# Altium PCB board2_pcb.PcbDoc
Units mil, origin at the board's own origin, x right, y up, seen from the top; angles counter-clockwise.
Board outline 3500 x 3500 mil, 2 copper layers (Top Layer, Bottom Layer), stack 61.756 mil thick; 47 components, 33 nets, 149 pads, 14 vias.
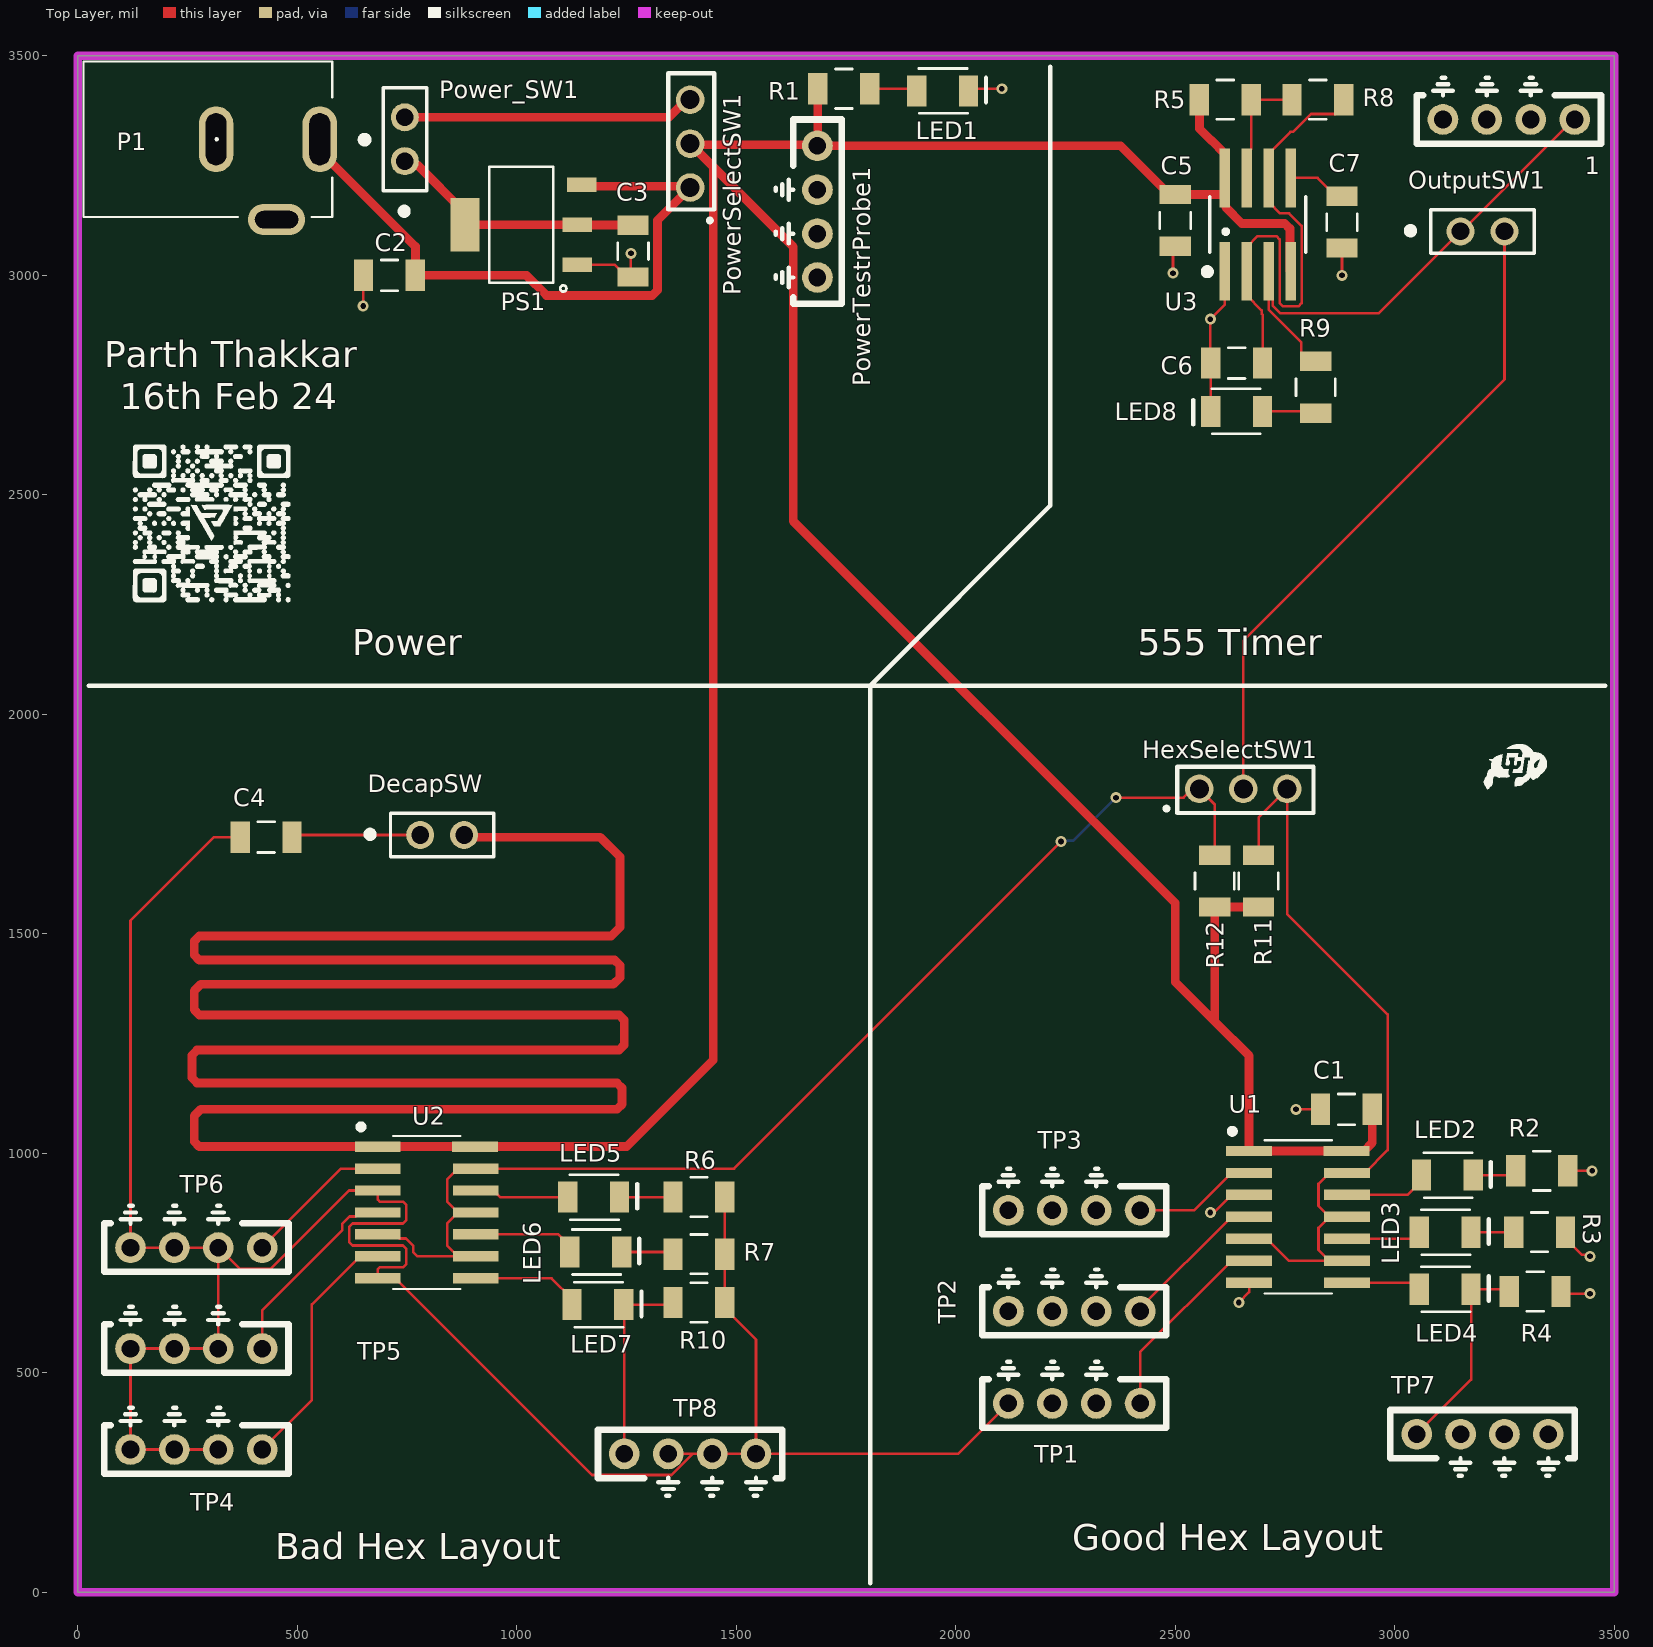
[diagram p0: Top Layer view]
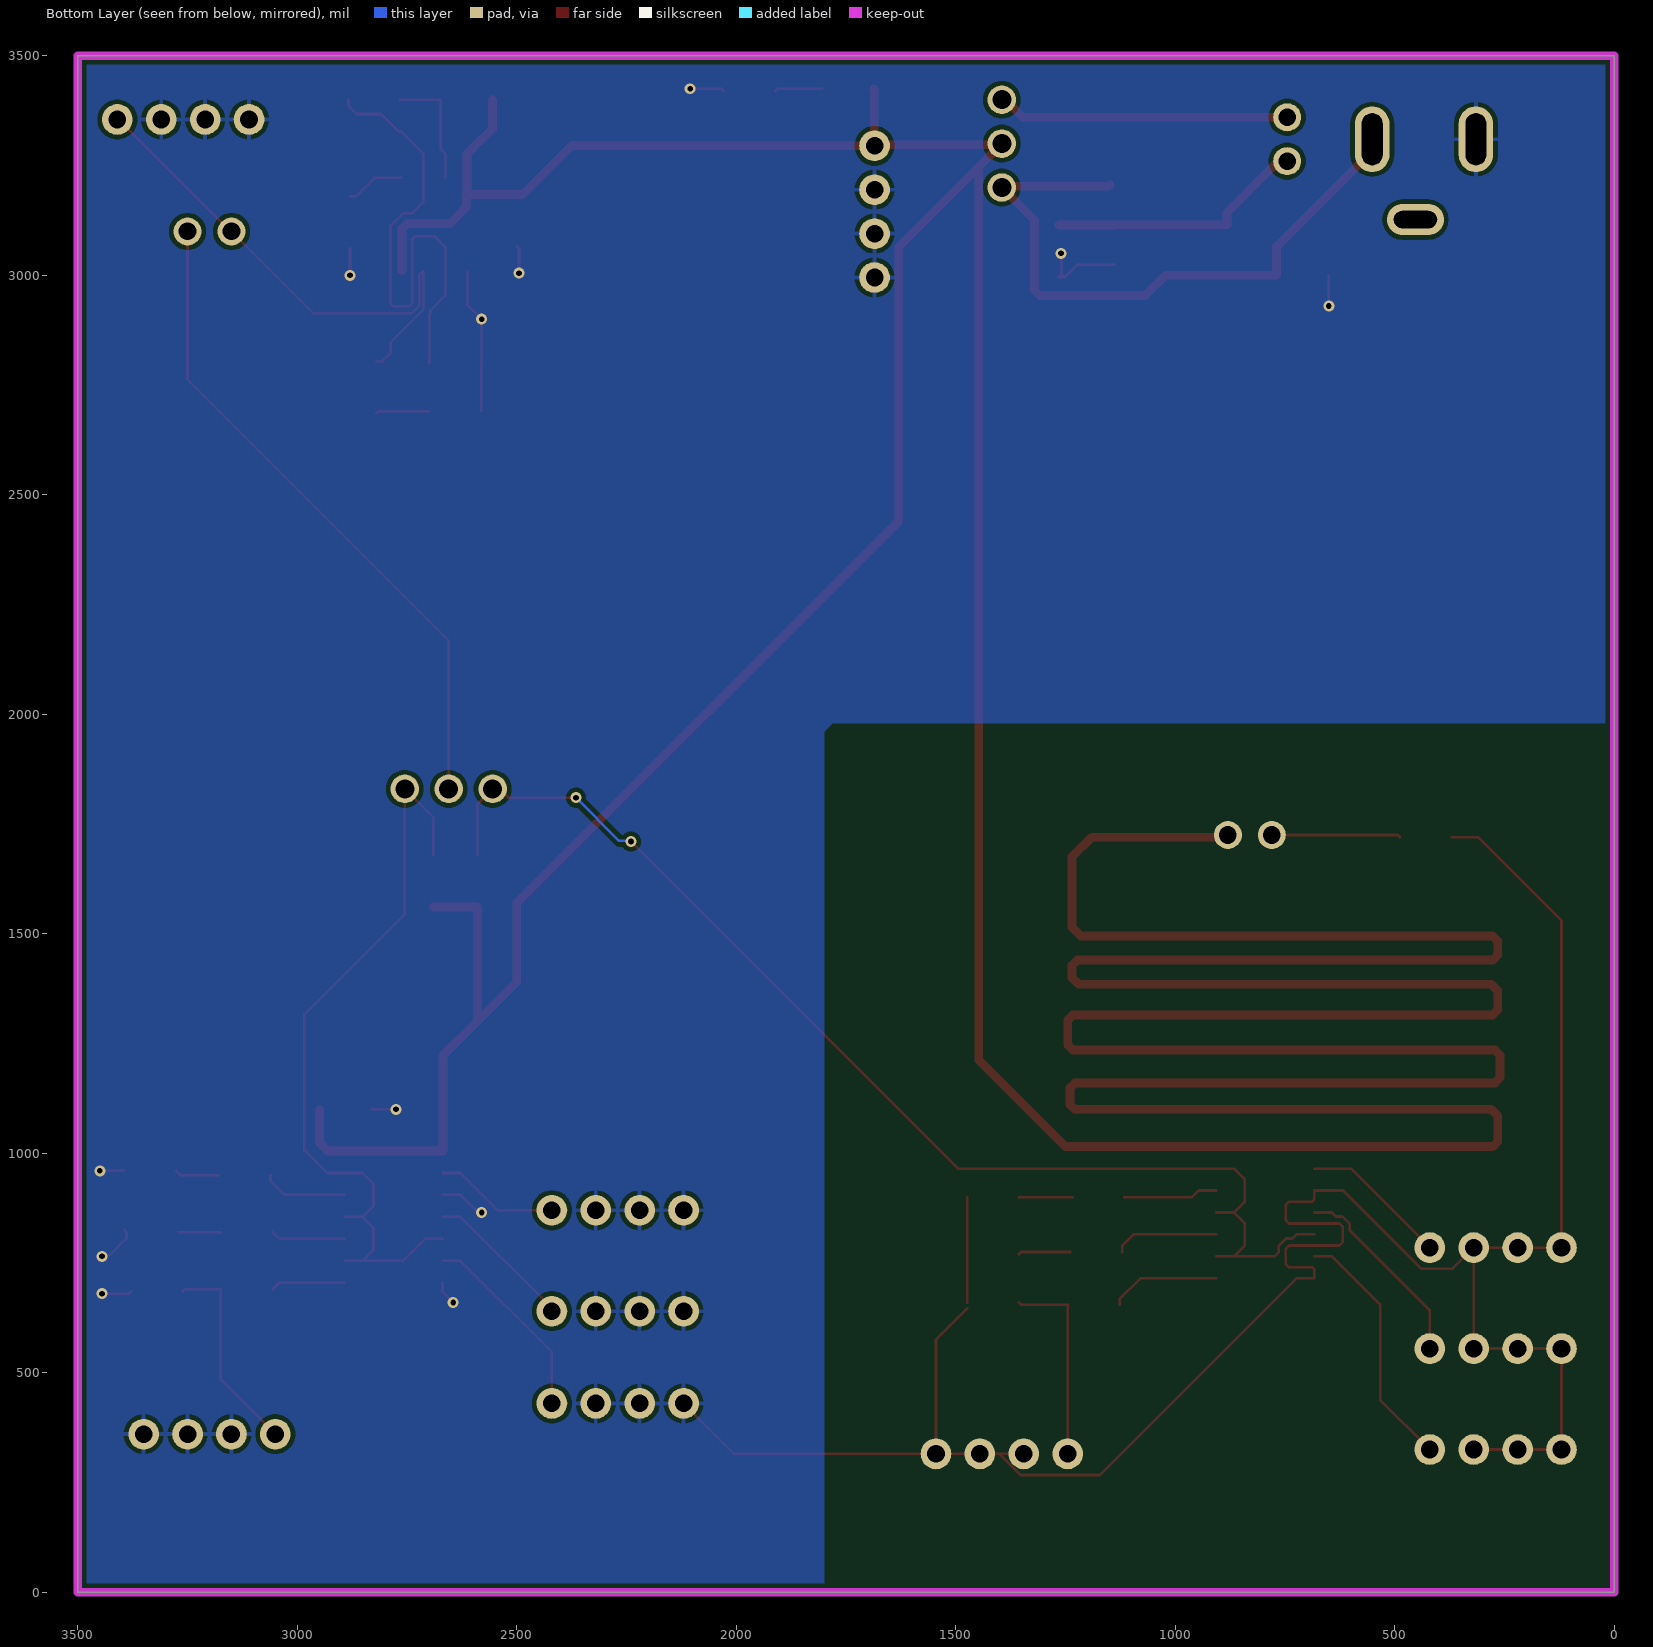
[diagram p1: Bottom Layer view, seen from below]
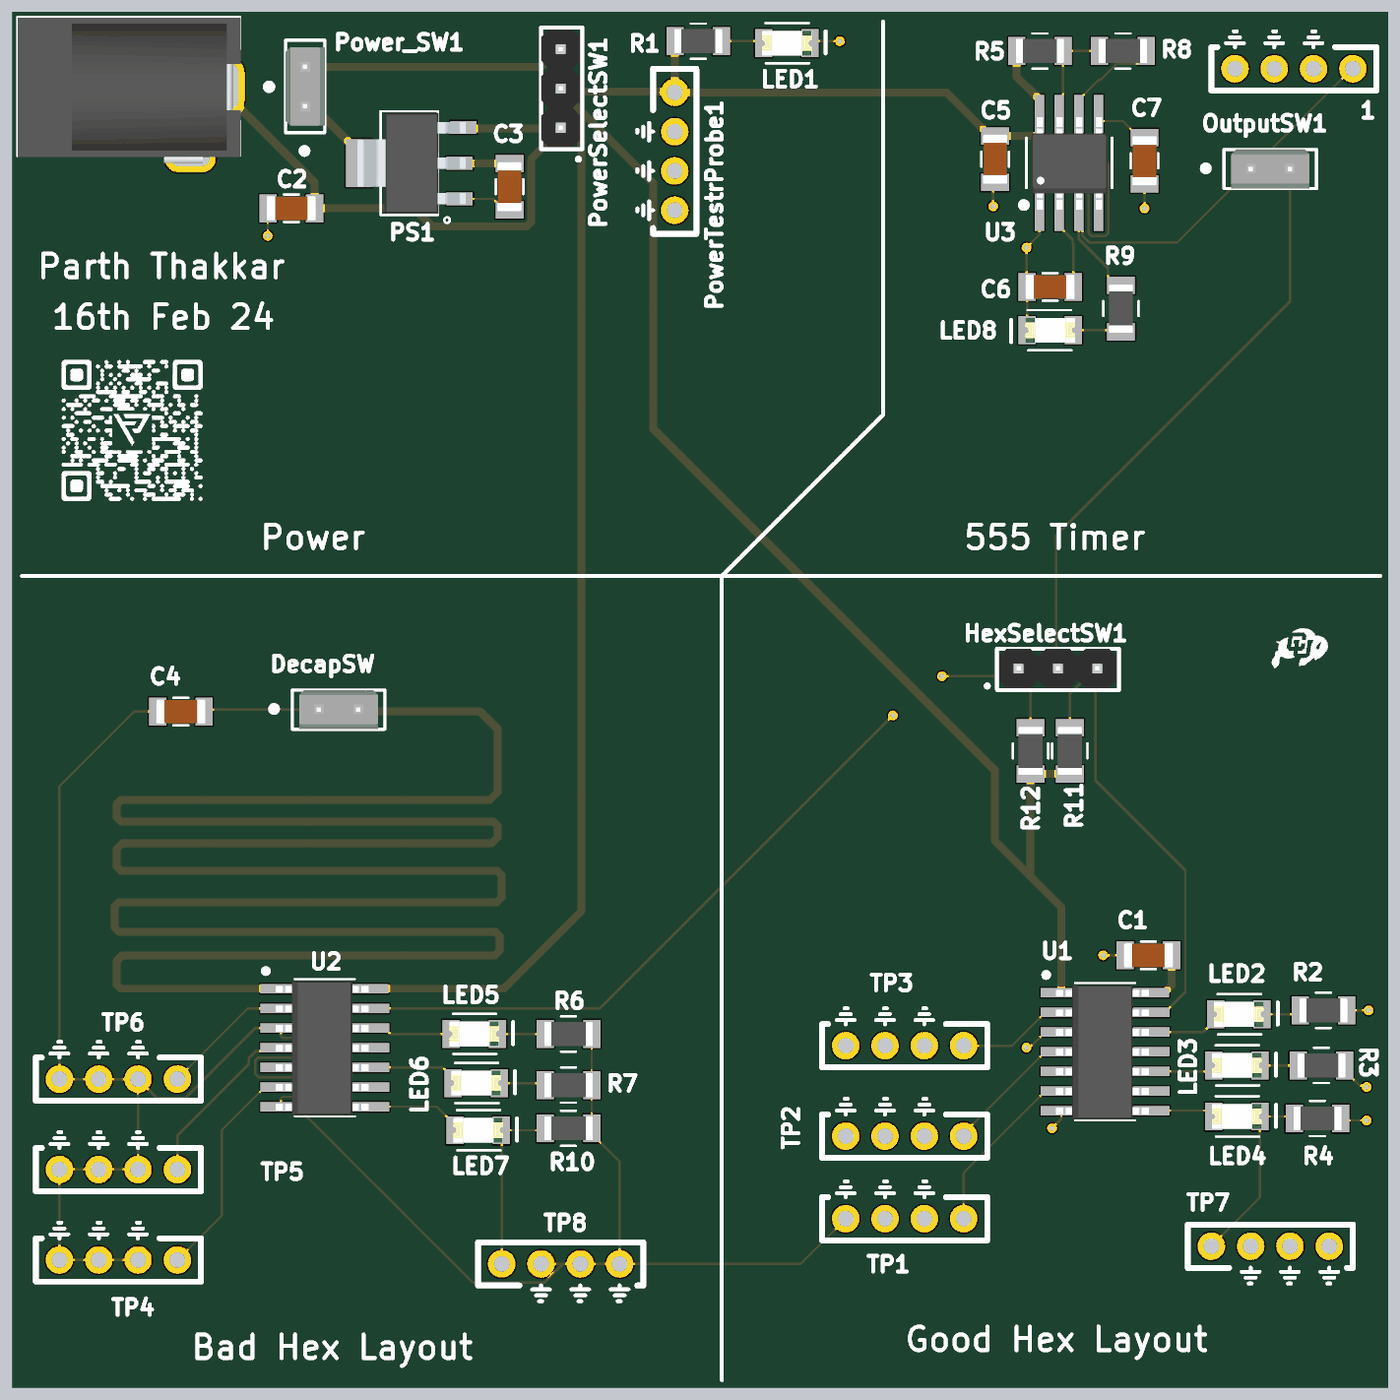
[diagram p2: 3D render of the assembled board from above, using the file's embedded part models]

## Layer stack, top to bottom
Top Solder: solder mask 1, SM-001, Dk 4
Top Layer: signal copper 1.378
Dielectric 1: core 59, Core-043, Dk 4.3
Bottom Layer: signal copper 1.378
Bottom Solder: solder mask 1, SM-001, Dk 4

## Board outline
0,0 3500,0 3500,3500 0,3500

## Design rules (kind name [scope] priority, off if disabled: settings)
BoardOutlineClearance [All] p1: gap=10 ignorepadtopadclearanceinfootprint=FALSE except(0: Arc-SplitContinuation Track-SplitContinuation SMDPad-SplitContinuation THPad-SplitContinuation Via-SplitContinuation Fill-SplitContinuation Poly-SplitContinuation Region-SplitContinuation Text-SplitContinuation)
Clearance [All] p1: gap=10 ignorepadtopadclearanceinfootprint=FALSE
HoleSize [All] p1: absolutevalues=TRUE maxlimit=150 minlimit=1 maxpercent=80.000 minpercent=20.000
PlaneClearance [All] p1: clearance=10
PolygonConnect [All] p1: thpad.connectstyle=Relief thpad.reliefconductorwidth=10 thpad.reliefentries=4 thpad.polygonreliefangle="90 Angle" thpad.airgapwidth=10 smdpad.connectstyle=Direct smdpad.reliefconductorwidth=10 smdpad.reliefentries=4 smdpad.polygonreliefangle="90 Angle" smdpad.airgapwidth=10 via.connectstyle=Direct via.reliefconductorwidth=10 via.reliefentries=4 via.polygonreliefangle="90 Angle" via.airgapwidth=10
RoutingVias [All] p1: holewidth=13 width=25 viastyle="Through Hole" minholewidth=13 minwidth=25 maxholewidth=50 maxwidth=60
SolderMaskExpansion [All] p1: expansion=4 istentingtop=FALSE
UnRoutedNet [All] p1: checkbadconnections=TRUE
Width "Schematic Width Constraint_3" [InNet('NetPower_SW1_2')] p1: maxlimit=30 minlimit=10 preferedwidth=20 minimp=50.000000 maximp=50.000000 favimp=50.000000
Width "Schematic Width Constraint_2" [InNet('VCC')] p2: maxlimit=30 minlimit=10 preferedwidth=20 minimp=50.000000 maximp=50.000000 favimp=50.000000
Width "Schematic Width Constraint_1" [InNet('NetC2_2')] p3: maxlimit=30 minlimit=10 preferedwidth=20 minimp=50.000000 maximp=50.000000 favimp=50.000000
Width "Schematic Width Constraint" [InNet('NetC3_2')] p4: maxlimit=30 minlimit=10 preferedwidth=20 minimp=50.000000 maximp=50.000000 favimp=50.000000
Width [All] p5: maxlimit=100 minlimit=6 preferedwidth=6 minimp=50.000000 maximp=50.000000 favimp=50.000000
27 further rules are at their usual default settings.

## Components (designator, comment, footprint, x,y, rotation, side; value= is the part's Value field where it differs from the comment)
1 "10x Probe TP" TP10x_Probe 3260,3355 r180 top
C1 "22pF" 1206_Passive_Capacitor 2890,1100 r0 top
C2 "10uF" 1206_Passive_Capacitor 710,3000 r0 top
C3 "10uF" 1206_Passive_Capacitor 1265,3055 r90 top
C4 "22pF" 1206_Passive_Capacitor 429,1720 r0 top
C5 "22pF" 1206_Passive_Capacitor 2500,3125 r270 top
C6 "1uF" 1206_Passive_Capacitor 2640,2800 r0 top
C7 "1uF" 1206_Passive_Capacitor 2880,3121 r90 top
DecapSW "SW_2Pin_100mil_Switch" 2Pin-Header-Conn 780,1725 r0 top
HexSelectSW1 "PREC003SAAN-RC" 3_PIN_100mil 2555,1830 r0 top value="CONN HEADER VERT 3POS 2.54MM"
LED1 "Blue" LED_1206 1970,3420 r0 top
LED2 "Blue" LED_1206 3120,950 r0 top
LED3 "Blue" LED_1206 3115,820 r0 top
LED4 "Blue" LED_1206 3115,690 r0 top
LED5 "Blue" LED_1206 1175,900 r0 top
LED6 "Blue" LED_1206 1180,775 r0 top
LED7 "Blue" LED_1206 1185,655 r0 top
LED8 "Blue" LED_1206 2640,2690 r180 top
OutputSW1 "SW_2Pin_100mil_Switch" 2Pin-Header-Conn 3150,3100 r0 top
P1 "Power Jack" Power_Jack 551.22,3310 r180 top value="CONN PWR JACK 2X5.5MM SOLDER"
Power_SW1 "SW_2Pin_100mil_Switch" 2Pin-Header-Conn 745,3260 r90 top
PowerSelectSW1 "PREC003SAAN-RC" 3_PIN_100mil 1395,3200 r90 top value="CONN HEADER VERT 3POS 2.54MM"
PowerTestrProbe1 "10x Probe TP" TP10x_Probe 1685,3145 r270 top
PS1 "AMS1117-3.3" LDO 1010,3115 r90 top value="IC REG LINEAR 3.3V 800MA SOT223"
R1 "1k" 1206_Passive_Resitor 1745,3425 r180 top value="1K Ohm"
R2 "50R" 1206_Passive_Resitor 3335,960 r180 top value="50 Ohm"
R3 "50R" 1206_Passive_Resitor 3330,820 r180 top value="50 Ohm"
R4 "50R" 1206_Passive_Resitor 3320,685 r180 top value="50 Ohm"
R5 "1k" 1206_Passive_Resitor 2614,3400 r180 top value="1K Ohm"
R6 "50R" 1206_Passive_Resitor 1415,900 r180 top value="50 Ohm"
R7 "50R" 1206_Passive_Resitor 1415,770 r180 top value="50 Ohm"
R8 "1k" 1206_Passive_Resitor 2825,3400 r180 top value="1K Ohm"
R9 "1k" 1206_Passive_Resitor 2820,2745 r90 top value="1K Ohm"
R10 "50R" 1206_Passive_Resitor 1415,660 r180 top value="50 Ohm"
R11 "10k" 1206_Passive_Resitor 2690,1620 r270 top value=10KOhm
R12 "10k" 1206_Passive_Resitor 2590,1620 r90 top value=10KOhm
TP1 "10x Probe TP" TP10x_Probe 2270,430 r180 top
TP2 "10x Probe TP" TP10x_Probe 2270,640 r180 top
TP3 "10x Probe TP" TP10x_Probe 2270,870 r180 top
TP4 "10x Probe TP" TP10x_Probe 270,325 r180 top
TP5 "10x Probe TP" TP10x_Probe 270,555 r180 top
TP6 "10x Probe TP" TP10x_Probe 270,785 r180 top
TP7 "10x Probe TP" TP10x_Probe 3200,360 r0 top
TP8 "10x Probe TP" TP10x_Probe 1395,315 r0 top
U1 "SN74AHC14DR" HEX_74AC14 2780,855 r0 top
U2 "SN74AHC14DR" HEX_74AC14 795,865 r0 top
U3 "LMC555CMX/NOPB" TS555IDTTR 2688.11,3115.6 r90 top

## Footprints (in the part's own frame and the unit in brackets; to place one, negate y for a bottom-side part, rotate by r counter-clockwise, add the part's x,y. Pads: shape width x height; smd on the part's side, far side on the other; paste and mask are expansions set on the pad)
2Pin-Header-Conn [mm]
  round 1.62 hole 1.02: 1(0,0) 2(2.54,0)
  silkscreen extent -3.02,-1.27 4.26,1.26, body extent -1.27,-1.27 3.81,1.27, height 8.13
3_PIN_100mil [mm]
  round 1.65 hole 1.1: 1(0,0) 2(2.54,0) 3(5.08,0)
  silkscreen extent -2,-1.4 6.6,1.27, body extent -1.14,-1.27 6.48,1.27, height 8.38
1206_Passive_Capacitor [mil]
  rect 44x71 smd: 1(-59,0) 2(59,0)
  silkscreen extent -19,-35 19,35, body extent -63,-31 63,32, height 50
1206_Passive_Resitor [mil]
  rect 44x71 smd: 1(-59,0) 2(59,0)
  silkscreen extent -19,-45 19,45, body extent -61,-31 61,31, height 26
HEX_74AC14 [mm]
  rect 2.65x0.6 smd: 1(-2.836,3.81) 2(-2.836,2.54) 3(-2.836,1.27) 4(-2.836,0) 5(-2.836,-1.27) 6(-2.836,-2.54) 7(-2.836,-3.81) 8(2.836,-3.81) 9(2.836,-2.54) 10(2.836,-1.27) 11(2.836,0) 12(2.836,1.27) 13(2.836,2.54) 14(2.794,3.81)
  silkscreen extent -3.94,-4.43 1.95,5.08, body extent -3.18,-4.35 2.82,4.3, height 1.75
LDO [mm]
  rect 0.838x1.7 smd: 1(-2.311,-3.25) 2(0,-3.25) 3(2.311,-3.5)
  rect 3.099x1.7 smd: 4(0,3.25)
  silkscreen extent -3.86,-2.62 3.35,1.85, body extent -3.25,-3.65 3.25,3.35, height 1.85
LED_1206 [mil]
  rect 44x71 smd: 1(-59,0) 2(59,0)
  silkscreen extent -54,-51 99,51, body extent -63,-31 63,31, height 28
Power_Jack [mm]
  oval 2x3.8 hole 1.2 slot 3 at 90 deg: 1(0,0) 2(6,0)
  oval 3.3x1.8 hole 1 slot 2.5 at 0 deg: 3(2.5,4.65)
  silkscreen extent -2.79,-4.5 13.68,4.5, body extent -0.76,-4.45 13.64,4.95, height 11.49
TP10x_Probe [mil] "Small Probs footprint"
  round 70 hole 40: 1(-150,0) 2(-50,0) 2(50,0) 2(150,0)
  silkscreen extent -210,-95 210,55
TS555IDTTR [mm] "IC OSC Single Timer 2.7MHz 8SOIC"
  rect 3.4x0.6 smd: 1(-2.7,1.905) 2(-2.7,0.635) 3(-2.7,-0.635) 4(-2.7,-1.905) 5(2.7,-1.905) 6(2.7,-0.635) 7(2.7,0.635) 8(2.7,1.905)
  silkscreen extent -2.85,-2.77 1.6,3.05, body extent -3.03,-2.48 2.96,2.43, height 1.75

## Part data
1 PowerTestrProbe1 TP1 TP2 TP3 TP4 TP5 TP6 TP7 TP8: library part TP_10x_Probe, "Test Point 300 mil centers"
C1 C4 C5: library part C_22pF_1206, "22pF ±5% 1kV C0G 1206 Multilayer Ceramic Capacitors MLCC - SMD/SMT RoHS", LCSC Part#=C107174, MFR Part #=CC1206JKNPOCBN220, Datasheet=https://datasheet.lcsc.com/lcsc/1810241219_YAGEO-CC1206JKNPOCBN220_C107174.pdf, Type=Extended
C2 C3: library part C_10uF_1206, "10uF ±10% 50V X5R 1206 Multilayer Ceramic Capacitors MLCC - SMD/SMT RoHS", LCSC Part#=C13585, MFR Part #=CL31A106KBHNNNE, Datasheet=https://datasheet.lcsc.com/lcsc/1810221112_Samsung-Electro-Mechanics-CL31A106KBHNNNE_C13585.pdf, Type=Basic
C6 C7: library part C_1uF_1206, "MULTILAYER CERAMIC CAPACITORS MLCC - SMD/SMT 1UF 50V 1206 ROHS", LCSC Part#=C1848, MFR Part #=CL31B105KBHNNNE, Digikey Link=https://www.digikey.com/product-detail/en/C1206C105M4RACTU/399-8150-1-ND/3471873/?itemSeq=304982366, Type=Basic
DecapSW OutputSW1 Power_SW1: "2Pin Header", LCSC Part#=C124375, Type=Extended
HexSelectSW1 PowerSelectSW1: library part SW_3Pin_100mil_Switch, "Connector Header Through Hole 3 position 0.100\" (2.54mm)", LCSC Part#=C49257, Digikey Link=https://www.digikey.com/product-detail/en/PREC003SAAN-RC/S1012EC-03-ND/2774851/?itemSeq=304982371, MFR Part #=PREC003SAAN-RC, Type=Extended
LED1 LED2 LED3 LED4 LED5 LED6 LED7 LED8: library part LED_BLUE_1206, "blue 1206  Light Emitting Diodes (LED) ROHS", LCSC Part#=C130717, MFR Part #=NCD1206B1, Datasheet=https://datasheet.lcsc.com/lcsc/2008201033_Foshan-NationStar-Optoelectronics-NCD1206B1_C130717.pdf, Type=Extended
P1: library part "P_Power Jack", "Power Barrel Connector Jack 2.10mm ID (0.083\"), 5.50mm OD (0.217\") Through Hole, Right Angle", LCSC Part#=C136744, MFR Part #=PJ-102A, Digikey Link=https://www.digikey.com/product-detail/en/PJ-102A/CP-102A-ND/275425/?itemSeq=304982367, Type=Extended
PS1: library part PS_AMS_LDO_3v3, "LOW DROPOUT REGULATORS(LDO) POSITIVE FIXED 1.3V @ 800MA 15V 3.3V 1A SOT-223 ROHS", LCSC Part#=C6186, MFR Part #=AMS1117-3.3, Type=Basic
R1 R5 R8 R9: library part R_1K_1206, "CHIP RESISTOR - SURFACE MOUNT 1KOHMS ±1% 1/4W 1206 ROHS", LCSC Part#=C4410, MFR Part #=RNCP1206FTD1K00CT, Digikey Link=https://www.digikey.com/product-detail/en/RNCP1206FTD1K00/RNCP1206FTD1K00CT-ND/2240675/?itemSeq=304982373, Type=Basic
R2 R3 R4 R6 R7 R10: library part R_1K_1206, "CHIP RESISTOR - SURFACE MOUNT 50OHMS ±1% 1/4W 1206 ROHS", LCSC Part#=C4410, MFR Part #=RNCP1206FTD1K00CT, Digikey Link=https://www.digikey.com/product-detail/en/RNCP1206FTD1K00/RNCP1206FTD1K00CT-ND/2240675/?itemSeq=304982373, Type=Basic
R11 R12: library part R_10KOhm_1206, "10 kOhms ±5% 0.25W, 1/4W Chip Resistor 1206 (3216 Metric) Automotive AEC-Q200 Thick Film", LCSC Part#=C17902, MFR Part #=RMCF1206FT10K0, Digikey Link=https://www.digikey.com/en/products/detail/stackpole-electronics-inc/RMCF1206FT10K0/1759669, Type=Basic
U1 U2: library part U_74AHC14, "Inverter IC 6 Channel Schmitt Trigger 14-SOIC", LCSC Part#=C6942, Datasheet=https://datasheet.lcsc.com/szlcsc/ON-Semicon-ON-74AC14SCX_C5482.pdf, MFR Part #=SN74AHC14DR, Type=Extended
U3: library part U_555_Fast, "555 Type, Timer/Oscillator _Single_ IC 3MHz 8-SO", LCSC Part#=C90760, Package=SOIC-8, Digikey Link=https://www.digikey.com/product-detail/en/texas-instruments/LMC555CMX-NOPB/LMC555CMX-NOPBCT-ND/1010550, MFR Part #=LMC555CMX/NOPB, Type=Extended

## Via types
v1: diameter 25, hole 13, Top Layer to Bottom Layer, 14 vias

## Nets (pads, with @x,y where several pads share a name; then routed paths per layer and width w, separated by ;. In a path a pad name is that pad's centre, name@x,y a point inside that pad or via, vN(x,y) a via of type N, cw(c..) or ccw(c..) an arc to the next point about the centre after c; other vN are vias at no path point)
GND: 1.2 C1.1 C2.1 C3.1 C4.1 C5.2 C6.1 C7.1 LED1.2 LED8.2 P1.2 PowerTestrProbe1.2 PS1.1 R2.1 R3.1 R4.1 R6.1 R7.1 R10.1 TP1.2 TP2.2 TP3.2 TP4.2 TP5.2 TP6.2 TP7.2 TP8.2 U1.3 U1.7 U2.3 U2.7 U3.1 | length 6732.9
  Top Layer w6: TP4.2@320,325 220,325 120,325 120,555 220,555 320,555 TP6.2@320,785 ; C4.1 310,1720 120,1530 120,785 220,785 TP6.2@320,785 ; v1(650,2930) 650,2999 C2.1 ; PS1.1 1223.5,3024 1251.5,2996 C3.1 ; C3.1@1251.5,2995 1260,3003.5 v1(1260,3050) ; TP8.2@1345,315 1400.4,315 ; R10.1@1474,646.5 1545,575.5 TP8.2@1545,315 ; R10.1 R7.1 R6.1 ; LED1.2 2034,3425 v1(2105,3425) ; TP1.2@2120,430 2005,315 TP8.2@1545,315 ; v1(2495,3005) 2495,3061 C5.2 ; v1(2580,865) 2583.64,868.64 2591.63,868.64 2627.99,905 U1.3 ; LED8.2 C6.1 2580,2801 v1(2580,2900) 2613.11,2933.11 U3.1 ; v1(2645,660) 2668.35,683.35 U1.7 ; v1(2775,1100) C1.1 ; v1(2880,3000) C7.1 ; R4.1 3384,680 v1(3445,680) ; R3.1@3394,825 R3.1 3389,806.5 3426.86,768.64 3441.36,768.64 v1(3445,765) ; R2.1 v1(3450,960) ; TP6.2@320,785 368,737 439.88,737 617.88,915 U2.3 683.35,894.19 687.72,889.81 740.9,889.81 748.51,882.2 748.51,847.8 740.52,839.81 625.8,839.81 618.18,832.2 618.18,797.8 626.17,789.81 740.9,789.81 748.51,782.2 748.51,747.8 740.9,740.19 687.72,740.19 683.35,735.81 U2.7 723.7,715 1171.7,267 1352.4,267 1400.4,315 ; 1400.4,315 1445,315 TP8.2@1545,315
Net1_1: 1.1 OutputSW1.1 R9.2 U3.3 | length 1217.9
  Top Layer w6: R9.2 2806.5,2804 2787.5,2823 2787.5,2846.99 2713.11,2921.38 U3.3 2721.92,3000.49 2721.92,2930.74 2739.29,2913.37 2963.37,2913.37 OutputSW1.1 3152.5,3100 3407.5,3355 1.1
NetC2_2: C2.2 P1.1 PowerSelectSW1.1 PS1.3 | length 1490.4
  Top Layer w20: P1.1 551.22,3283.28 769,3065.5 C2.2 1021.89,3000 1067.89,2954 1308.78,2954 1320.5,2965.72 1320.5,3125.5 PowerSelectSW1.1 1392,3203 1150.8,3203 PS1.3
NetC3_2: C3.2 Power_SW1.1 PS1.2 PS1.4 | length 596.6
  Top Layer w20: Power_SW1.1 753.38,3251.62 772.96,3251.62 882.05,3142.54 PS1.4 PS1.2 1138.45,3114.5 1264.5,3114.5 C3.2
NetC4_2: C4.2 DecapSW.1 | length 294.1
  Top Layer w6: C4.2 493,1725 DecapSW.1
NetC6_2: C6.2 R8.1 U3.2 U3.6 | length 1180.9
  Top Layer w6: C6.2 2699,2910.33 2697.11,2912.22 2697.11,2920.18 2663.11,2954.18 U3.2 2663.11,3064.42 2687.92,3089.23 2730.3,3089.23 2738.11,3081.43 2738.11,2937.18 2745.91,2929.37 2780.3,2929.37 2787.92,2936.99 2787.92,3112.26 2759.11,3141.07 2738.82,3141.07 2713.11,3166.78 U3.6 2713.11,3277.02 2762.76,3326.66 2768.55,3326.66 2809.38,3367.5 2865,3367.5 2884,3386.5 R8.1
NetC7_2: C7.2 U3.5 | length 134.2
  Top Layer w6: U3.5 2824.6,3221.9 2866.5,3180 C7.2
NetHexSelectSW1_2: HexSelectSW1.2 OutputSW1.2 | length 1516.5
  Top Layer w6: HexSelectSW1.2 2655,2167.66 3250,2762.66 OutputSW1.2
NetLED1_1: LED1.1 R1.1 | length 109.1
  Top Layer w6: R1.1 1906,3425 LED1.1
NetLED2_1: LED2.1 U1.12 | length 195.9
  Top Layer w6: U1.12 3029.5,905 3061,936.5 LED2.1
NetLED2_2: LED2.2 R2.2 | length 101.1
  Top Layer w6: LED2.2 3266,950 R2.2
NetLED3_1: LED3.1 U1.10 | length 170.6
  Top Layer w6: U1.10 3041,805 LED3.1
NetLED3_2: LED3.2 R3.2 | length 97
  Top Layer w6: LED3.2 R3.2
NetLED4_1: LED4.1 U1.8 | length 170.6
  Top Layer w6: U1.8 3041,705 LED4.1
NetLED4_2: LED4.2 R4.2 TP7.1 | length 470.4
  Top Layer w6: TP7.1 3174,484 LED4.2 3256,690 R4.2
NetLED5_1: LED5.1 U2.12 | length 215.6
  Top Layer w6: U2.12 947.01,915 962.01,900 LED5.1
NetLED5_2: LED5.2 R6.2 | length 122
  Top Layer w6: LED5.2 R6.2
NetLED6_1: LED6.1 U2.10 | length 238.8
  Top Layer w6: U2.10 1094.5,815 1121,788.5 LED6.1
NetLED6_2: LED6.2 R7.2 | length 119.1
  Top Layer w6: LED6.2 1351,775 R7.2
NetLED7_1: LED7.1 U2.8 | length 252.1
  Top Layer w6: U2.8 1079.5,715 1126,668.5 LED7.1
NetLED7_2: LED7.2 R10.2 TP8.1 | length 454.5
  Top Layer w6: TP8.1 1245,654 LED7.2 1351,655 R10.2
NetLED8_1: LED8.1 R9.1 | length 122.7
  Top Layer w6: LED8.1 2816,2690 R9.1
NetPower_SW1_2: Power_SW1.2 PowerSelectSW1.3 | length 666.6
  Top Layer w20: Power_SW1.2 1346.64,3360 1386.64,3400 PowerSelectSW1.3
NetR5_1: R5.1 R8.2 U3.7 | length 275.2
  Top Layer w6: U3.7 2663.11,3277.02 2673,3286.91 R5.1 R8.2
NetTP1_1: TP1.1 U1.6 | length 451.5
  Top Layer w6: TP1.1 2420,547.01 2627.99,755 U1.6
NetTP2_1: TP2.1 U1.4 | length 341.5
  Top Layer w6: TP2.1 2420,647.01 2627.99,855 U1.4
NetTP3_1: TP3.1 U1.2 | length 283.6
  Top Layer w6: TP3.1 2542.99,870 2627.99,955 U1.2
NetTP4_1: TP4.1 U2.6 | length 572.7
  Top Layer w6: TP4.1 533.21,438.21 533.21,655.22 642.99,765 U2.6
NetTP5_1: TP5.1 U2.4 | length 451.3
  Top Layer w6: TP5.1 420,642.01 602.18,824.19 602.18,838.82 619.17,855.81 633.8,855.81 642.99,865 U2.4
NetTP6_1: TP6.1 U2.2 | length 337.9
  Top Layer w6: TP6.1 600,965 U2.2
Output555: HexSelectSW1.3 R11.1 U1.5 U1.9 U1.11 U1.13 | length 1775.5
  Top Layer w6: U1.5 2708.7,805 2758.7,755 U1.9@2851.3,755 ; R11.1 2690,1765 HexSelectSW1.3 2755,1545.2 2984,1316.2 2984,1006.99 2932.01,955 U1.13 2851.3,955 2826.49,930.19 2826.49,879.81 U1.11@2851.3,855 ; U1.9 U1.9@2851.3,755 ; U1.11 U1.11@2851.3,855 ; U1.9@2851.3,755 2826.49,779.81 2826.49,830.19 U1.11@2851.3,855
Output555_2: HexSelectSW1.1 R12.2 U2.5 U2.9 U2.11 U2.13 | length 2746.5
  Top Layer w6: U2.5 723.7,815 732.89,805.81 747.52,805.81 764.51,788.82 764.51,774.19 773.7,765 U2.9@866.3,765 ; U2.9 U2.9@866.3,765 ; U2.11 U2.11@866.3,865 ; v1(2240,1710) 1495,965 U2.13 866.3,965 841.49,940.19 841.49,889.81 U2.11@866.3,865 ; v1(2365,1810) 2519.05,1810 2539.05,1830 HexSelectSW1.1 2590,1795 R12.2 ; U2.9@866.3,765 841.49,789.81 841.49,840.19 U2.11@866.3,865
  Bottom Layer w6: v1(2240,1710) 2241.64,1711.64 2266.64,1711.64 v1(2365,1810)
VCC: C1.2 C5.1 DecapSW.2 PowerSelectSW1.2 PowerTestrProbe1.1 R1.2 R5.2 R11.2 R12.1 U1.1 U1.14 U2.1 U2.14 U3.4 U3.8 | length 16525.3
  Top Layer w20: DecapSW.2 885,1720 1190,1720 1235,1675 1235,1515 1215,1495 276.72,1495 265,1483.28 265,1451.72 276.72,1440 1223.28,1440 1235,1428.28 1235,1400 1220,1385 280,1385 265,1370 265,1326.72 276.72,1315 1233.28,1315 1245,1303.28 1245,1246.72 1233.28,1235 271.72,1235 260,1223.28 260,1171.72 271.72,1160 1228.28,1160 1240,1148.28 1240,1111.72 1228.28,1100 280,1100 265,1085 265,1026.72 276.72,1015 U2.1 U2.14 1250,1015 1447.48,1212.48 1447.48,3247.52 ; PowerSelectSW1.2 PowerSelectSW1.2@1397.5,3297.5 ; R1.2 1685.5,3424.5 1685.5,3295.5 PowerTestrProbe1.1 ; R5.2 2555,3334.5 2582.39,3307.11 2583.01,3307.11 2613.11,3277.02 U3.8 U3.8@2613.11,3185.81 ; R11.2 R12.1 2590,1300 ; U3.4@2761.3,3011.11 2761.3,3106.35 2749.58,3118.07 2651.93,3118.07 2614.92,3155.08 2614.92,3184 U3.8@2613.11,3185.81 ; C1.2 2949,1023.65 2930.35,1005 U1.14 U1.1 2668.35,1221.65 2590,1300 ; PowerSelectSW1.2@1397.5,3297.5 1447.48,3247.52 ; PowerSelectSW1.2@1397.5,3297.5 1682.5,3297.5 PowerTestrProbe1.1 ; 1447.48,3247.52 1630,3065 1630,2440 2500,1570 2500,1390 2590,1300 ; PowerTestrProbe1.1 2375.5,3295 2486.5,3184 C5.1 2611.3,3184 U3.8@2613.11,3185.81
pads on no net: P1.3

## Polygon pours and split planes (outlines as drawn)
GND on Bottom Layer "GND_L02_P000" (solid, pour order 0): 10,3490 3490,3490 3490,10 1800,10 1800,1960 1780,1980 340,1980 10,1980

## Keep-outs
Keep-Out Layer:
  the board outline again, w20

## Silkscreen, mask and mechanical layers (free items; w line width, h text height)
Top Overlay:
  drawing of 82 lines, arcs and shapes, not listed
  text "Parth Thakkar" at 60,2790 h60
  text "16th Feb 24" at 95,2695 h60
  text "Power" at 625,2135 h60
  text "555 Timer" at 2415,2135 h60
  text "Good Hex Layout" at 2265,94.99 h60
  text "Bad Hex Layout" at 450,74.99 h60